# EAGLE board stepper-v1 (EAGLE 6.4)
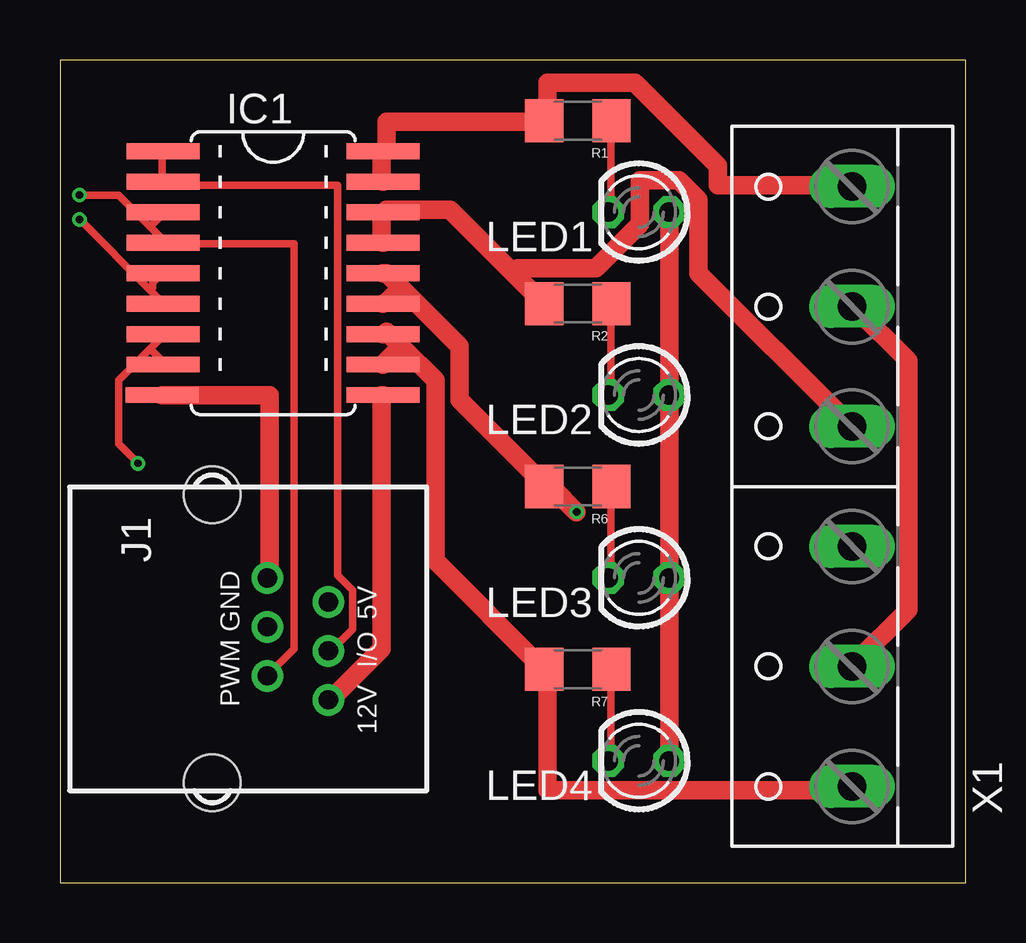
[diagram p0: board, top side]
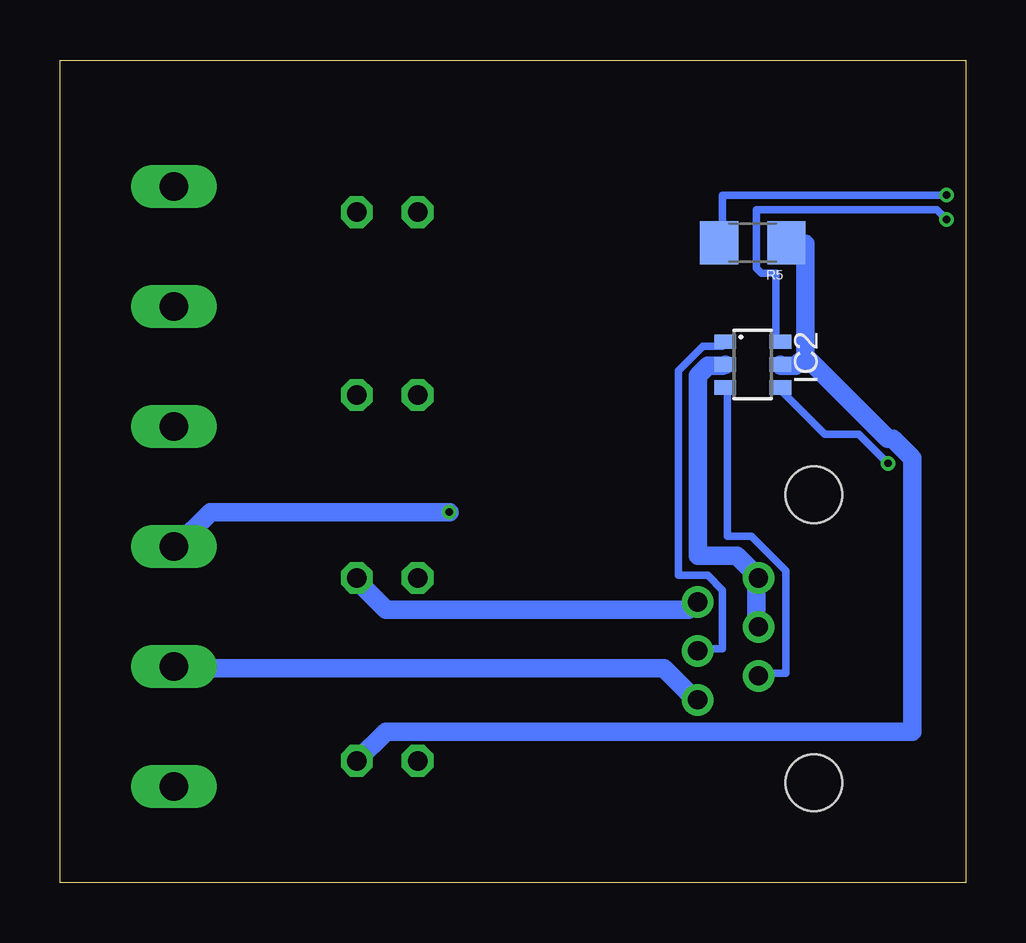
[diagram p1: board, bottom side, seen from below]

Size 37.77 x 34.28 mm. Coordinates in mm from the lower left corner, seen from the top.
Outline: 0,0 37.77,0 37.77,34.28 0,34.28 0,0
Copper layers (1*16): Top 0.035mm / dielectric 1.5mm / Bottom 0.035mm
Design rules "Fusion_eagle_rule_v1.1": minimum track width 6mil, minimum drill 12mil, track to track 6mil, track to pad 6mil, pad to pad 6mil, via to via 6mil, smd to smd 0mil, copper to edge 10mil, drill to drill 10mil, minimum pad ring 10mil, minimum via ring 6mil, stop-mask expansion 2mil, vias tented up to drill 100mil, thermal gap 10mil
Net classes: 0 default: width 0.305 mm; 1 power: width 0.762 mm
bRestrict: area 8.3,19.1 to 9.5,24.1
vRestrict: area 1.3,17.8 to 16.5,31.8

## Footprints (pad centres in the part's own frame; a part is rotated, then mirrored left to right if it is on the bottom)
SO18W = smd 0.66 x 3.048: 1 -5.08,-4.585; 2 -3.81,-4.585; 3 -2.54,-4.585; 4 -1.27,-4.585; 5 0,-4.585; 6 1.27,-4.585; 7 2.54,-4.585; 8 3.81,-4.585; 9 5.08,-4.623; 10 5.08,4.585; 11 3.81,4.585; 12 2.54,4.585; 13 1.27,4.585; 14 0,4.585; 15 -1.27,4.585; 16 -2.54,4.585; 17 -3.81,4.585; 18 -5.08,4.585
SOT23-6 = smd 0.6 x 0.9: 1 -0.95,-1.15; 2 0,-1.15; 3 0.95,-1.15; 4 0.95,1.15; 5 0,1.15; 6 -0.95,1.15
RJ12-RIGHTANGLE = drill 0.8 pad 1.3: +5V -1.54,4.84; +12V 2.54,4.84; GND1 -2.54,2.3; GND2 -0.5,2.3; I/O 0.5,4.84; PWM 1.54,2.3 | hole 2.36: -6,0; 6,0
LED3MM = drill 0.813 octagon: A -1.27,0; K 1.27,0
1206 = smd 1.6 x 1.8: 1 -1.4,0; 2 1.4,0
W237-6 = drill 1.194 long: 1 -12.5,-1.27; 2 -7.5,-1.27; 3 -2.5,-1.27; 4 2.5,-1.27; 5 7.5,-1.27; 6 12.5,-1.27

## Placement (x,y rotation side)
IC1  [SO18W]  8.89,25.4 270 top
IC2  SN74LVC2G14  [SOT23-6]  8.89,21.59 270 bottom
J1  RJ12RIGHTANGLE  [RJ12-RIGHTANGLE]  6.35,10.16 270 top
LED1  LED3MM  [LED3MM]  24.13,27.94 180 top
LED2  LED3MM  [LED3MM]  24.13,20.32 180 top
LED3  LED3MM  [LED3MM]  24.13,12.7 180 top
LED4  LED3MM  [LED3MM]  24.13,5.08 180 top
R1  1k  [1206]  21.59,31.75 180 top
R2  1k  [1206]  21.59,24.13 180 top
R5  1k  [1206]  8.89,26.67 180 bottom
R6  1k  [1206]  21.59,16.51 180 top
R7  1k  [1206]  21.59,8.89 180 top
X1  [W237-6]  31.75,16.51 90 top

## Library data of the parts
IC1 IC2 J1 LED1-LED4 = lpatiny
R1 R2 R5-R7 = SparkFun
X1 = con-wago-500; OC_FARNELL: unknown; OC_NEWARK: unknown

## Nets
+5V [power]: IC2.5 J1.+5V LED1.A LED2.A LED3.A LED4.A R5.1
+12V [power]: IC1.10 J1.+12V X1.2 X1.5
GND [power]: IC1.9 IC2.2 J1.GND1 J1.GND2
N$1: IC1.1 IC1.2 IC2.1 J1.I/O
N$2: IC1.3 IC1.4 IC2.3 J1.PWM R5.2
N$3 [power]: IC1.17 IC1.18 R1.2 X1.6
N$4 [power]: IC1.15 IC1.16 R2.2 X1.4
N$5 [power]: IC1.13 IC1.14 R6.2 X1.3
N$6 [power]: IC1.11 IC1.12 R7.2 X1.1
N$7: IC1.7 IC1.8 IC2.4
N$9: LED1.K R1.1
N$10: LED2.K R2.1
N$11: LED3.K R6.1
N$12: LED4.K R7.1
N$14: IC1.5 IC1.6 IC2.6

## Tracks (layer width: path | path; a pad name or v marks a point on that pad's centre or on a via)
+5V
  Top 0.762: LED4.A LED3.A LED2.A LED1.A
  Bottom 0.762: 6.71,21.95 7.11,21.54 7.72,21.54 IC2.5 | 6.71,21.95 6.71,26.62 7.32,26.62 R5.1 | J1.+5V 11.38,11.58 11.58,11.38 24.18,11.38 25.4,12.6 LED3.A | 6.71,21.95 3.25,18.49 3.05,18.49 2.23,17.68 2.23,6.3 24.18,6.3 LED4.A
+12V
  Top 0.762: J1.+12V 11.38,7.72 13.41,9.75 13.41,20.32 IC1.10 | X1.2 33.12,9.14 35.36,11.38 35.36,21.74 33.12,23.98 X1.5
  Bottom 0.762: J1.+12V 11.38,7.72 12.6,8.94 32.92,8.94 X1.2
GND
  Top 0.762: IC1.9 8.74,20.32 8.74,12.8 J1.GND1
  Bottom 0.762: IC2.2 10.16,21.54 10.77,21.54 11.18,21.13 11.18,13.61 9.55,13.61 8.74,12.8 J1.GND1 8.74,12.39 8.74,10.77 J1.GND2
N$1
  Top 0.305: IC1.1 4.27,30.48 4.27,29.26 IC1.2 4.47,29.06 11.58,29.06 11.58,12.8 12.19,12.19 12.19,10.57 11.38,9.75 J1.I/O
  Bottom 0.305: IC2.1 10.16,22.35 10.97,22.35 11.99,21.34 11.99,12.8 10.77,12.8 10.16,12.19 10.16,9.75 11.18,9.75 J1.I/O
N$2  (via drill 0.3)
  Top 0.305: v0.81,28.65 2.44,28.65 3.76,27.33 | 3.76,27.33 4.27,26.82 IC1.4 4.47,26.62 9.75,26.62 9.75,9.75 8.74,8.74 J1.PWM | 3.76,27.33 4.27,27.84 IC1.3
  Bottom 0.305: v0.81,28.65 10.16,28.65 10.16,26.82 R5.2 | IC2.3 9.96,20.52 9.96,14.43 8.94,14.43 7.52,13.01 7.52,8.74 8.53,8.74 J1.PWM
N$3
  Top 0.762: IC1.17 13.41,29.26 13.41,30.28 IC1.18 13.61,30.48 13.61,31.7 20.12,31.7 R1.2 20.32,32.11 20.32,33.33 23.98,33.33 27.43,29.87 27.43,29.06 32.92,29.06 X1.6
N$4
  Top 0.762: 18.9,25.4 16.26,28.04 13.61,28.04 IC1.16 13.41,27.64 13.41,26.82 IC1.15 | 18.9,25.4 20.12,24.18 R2.2 | X1.4 32.92,19.1 26.62,25.4 26.62,28.45 25.81,29.26 24.18,29.26 24.18,27.43 22.35,25.6 19.1,25.6 18.9,25.4
N$5  (via drill 0.3)
  Top 0.762: 14.22,24.79 13.61,25.4 IC1.14 | 14.22,24.79 16.66,22.35 16.66,20.12 20.12,16.66 R6.2 20.52,16.46 v21.54,15.44 | 14.22,24.79 13.61,24.18 IC1.13
  Bottom 0.762: v21.54,15.44 31.5,15.44 32.92,14.02 X1.3
N$6
  Top 0.762: 14.22,22.35 13.61,22.96 IC1.12 | 14.22,22.35 15.65,20.93 15.65,13.41 20.12,8.94 R7.2 20.32,8.53 20.32,3.86 32.92,3.86 X1.1 | 14.22,22.35 13.61,21.74 IC1.11
N$7  (via drill 0.3)
  Top 0.305: v3.25,17.48 2.44,18.29 2.44,20.93 3.76,22.25 | 3.76,22.25 4.27,22.76 IC1.7 | 3.76,22.25 4.27,21.74 IC1.8
  Bottom 0.305: v3.25,17.48 4.47,18.69 5.89,18.69 7.72,20.52 IC2.4
N$9
  Top 0.305: R1.1 22.96,31.7 22.96,28.04 LED1.K
N$10
  Top 0.305: R2.1 22.96,23.98 22.96,20.32 LED2.K
N$11
  Top 0.305: R6.1 22.96,16.46 22.96,12.8 LED3.K
N$12
  Top 0.305: R7.1 22.96,8.74 22.96,5.08 LED4.K
N$14  (via drill 0.3)
  Top 0.305: 3.76,24.69 4.27,24.18 IC1.6 | 3.76,24.69 v0.81,27.64 | IC1.5 4.27,25.4 3.86,24.99 3.86,24.79 3.76,24.69
  Bottom 0.305: v0.81,27.64 1.22,28.04 8.74,28.04 8.74,25.6 8.53,25.4 7.92,25.4 7.92,22.55 IC2.6

## Text on the board
tDocu: Stepper 1.0 - 12V